# Allegro board HAT_MANUALROUTE_2_GND_MITERED.brd
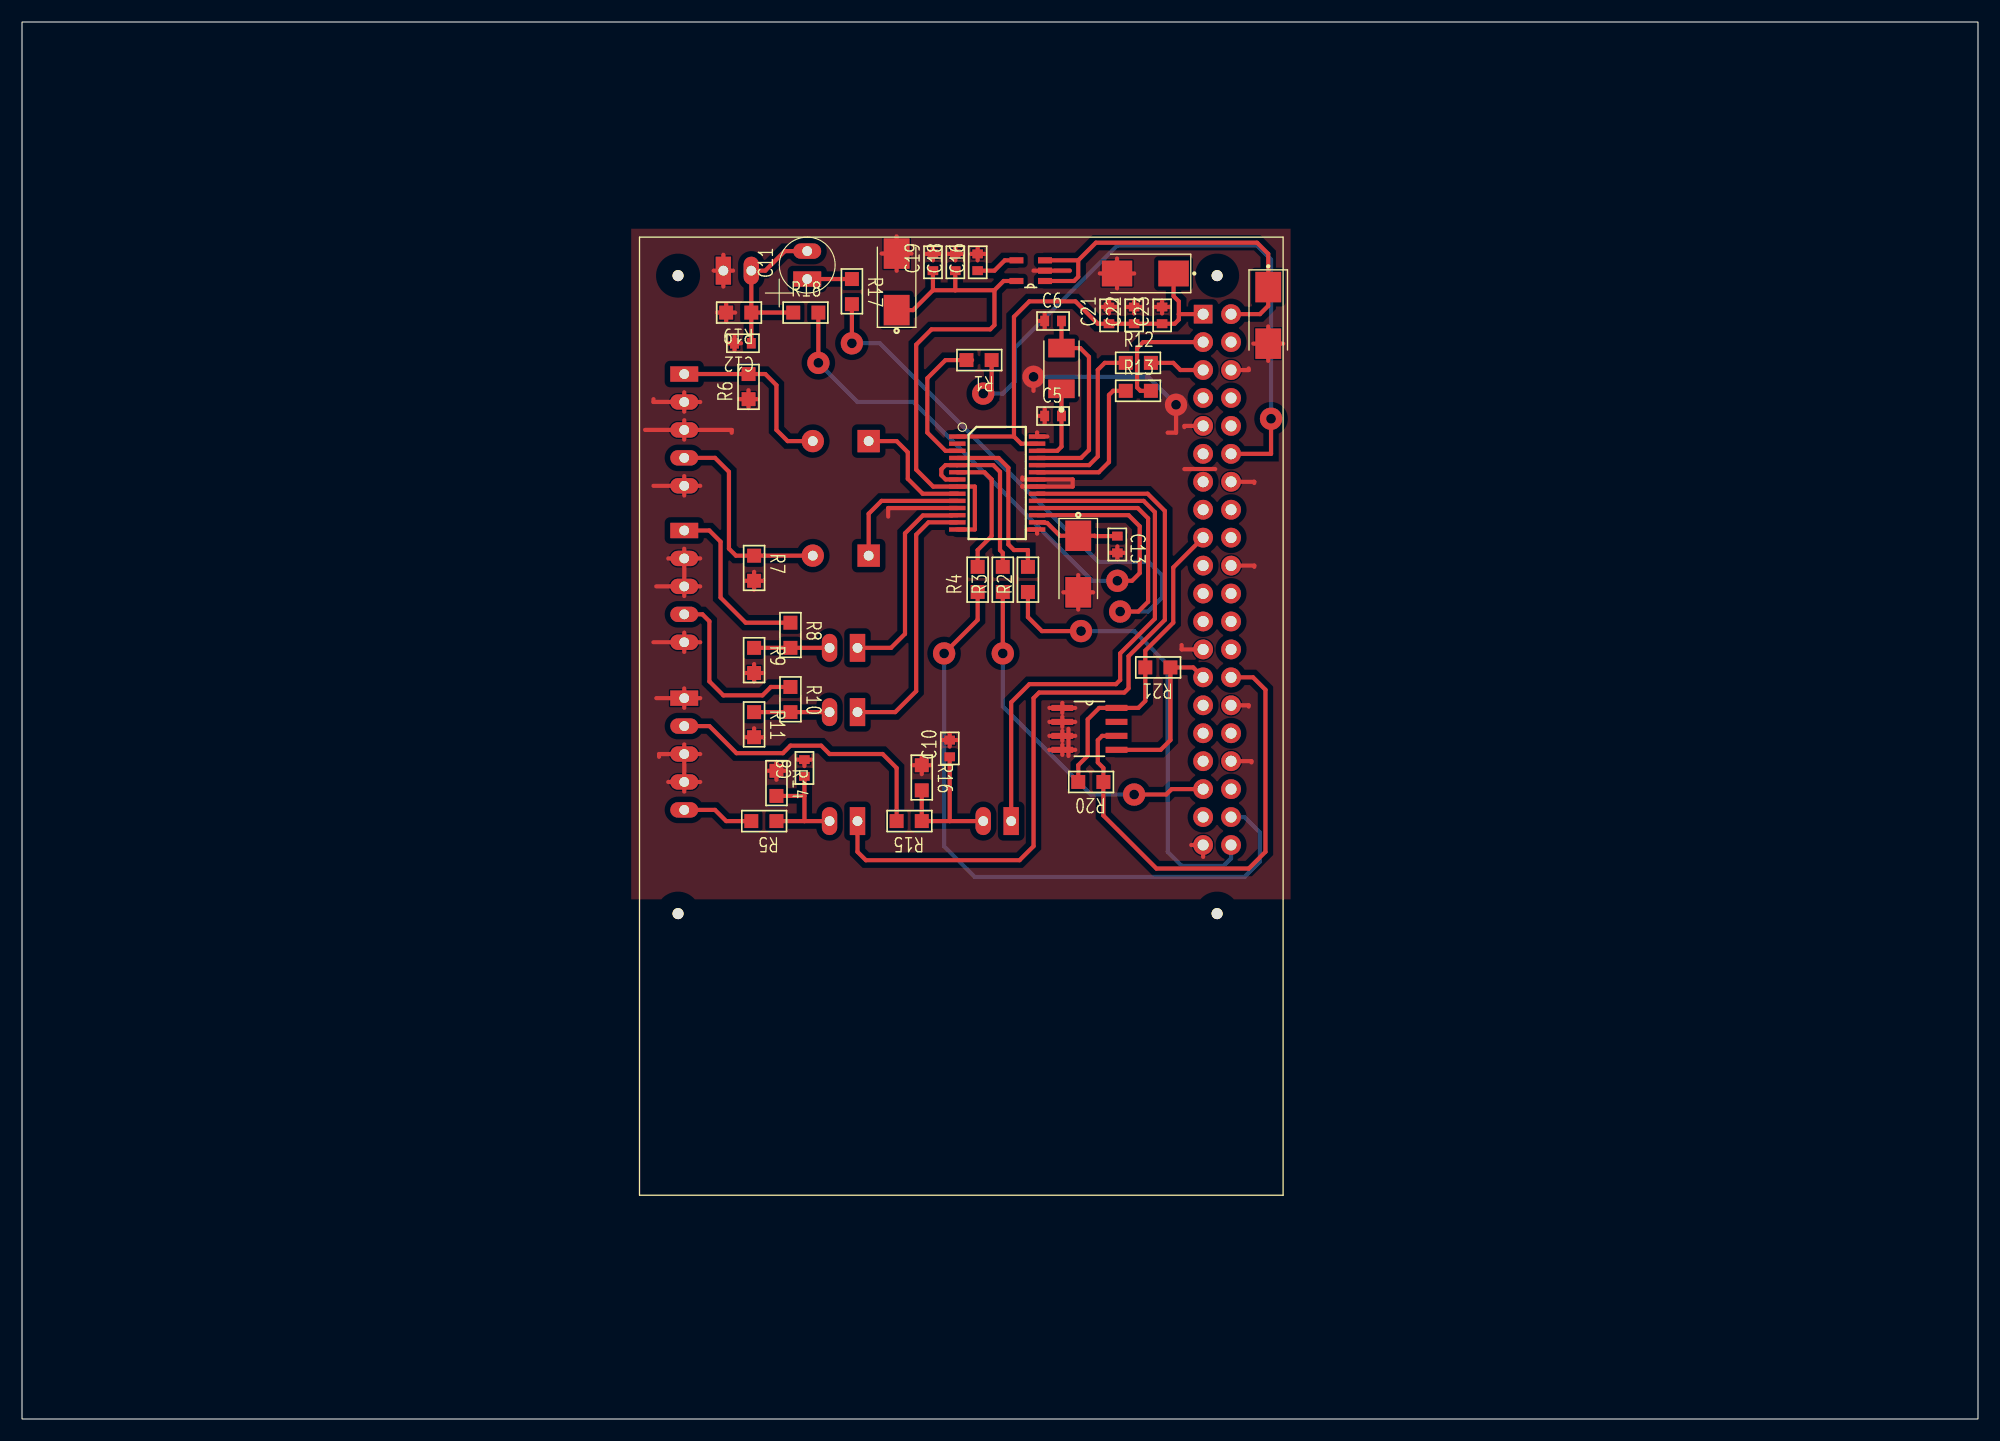
[diagram p0: board, top side]
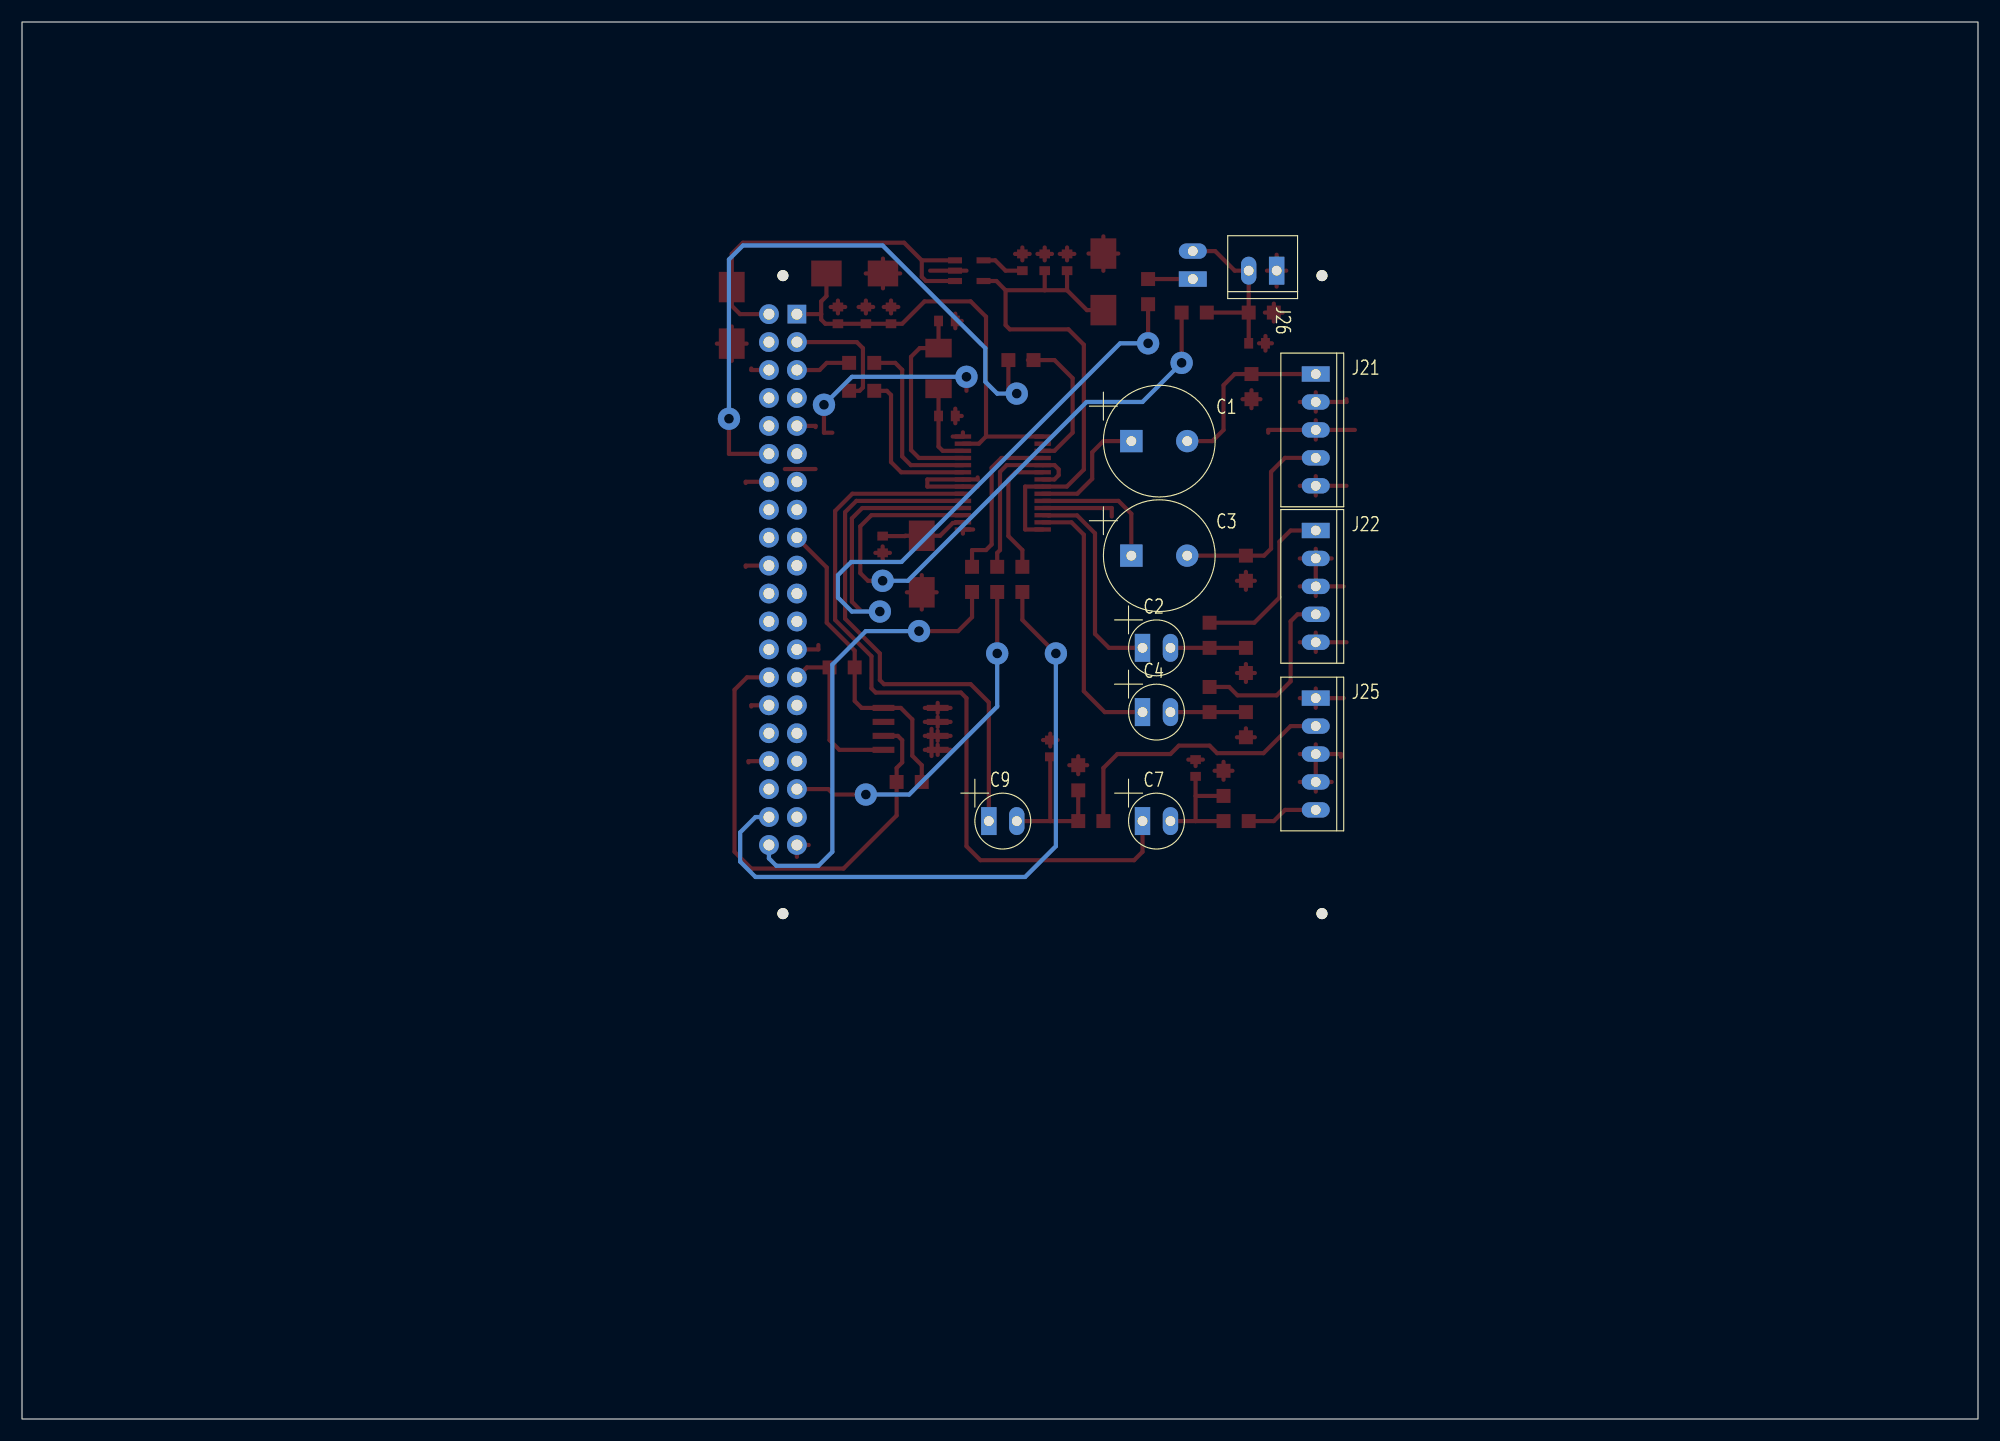
[diagram p1: board, bottom side, seen from below]

Outline 177.8 x 127 mm; copper layers: TOP, BOTTOM. Coordinates in mm from the lower left corner of the outline.
Outline path: rectangle 0,0 177.8,127

## Design rules (mm)
constraint set DEFAULT: min track width 0.381

## Placement (name value [footprint] x y rotation side)
C1  220uF  [GU-CAPCYL200]  76.96 88.9 180 bottom
C2  10uF  [GU-CAPCYL100]  75.95 70.1 180 bottom
C3  220uF  [GU-CAPCYL200]  76.96 78.49 180 bottom
C4  10uF  [GU-CAPCYL100]  75.95 64.26 180 bottom
C5  22pF  [GU-C0603]  92.96 91.19 0 top
C6  22pF  [GU-C0603]  92.96 99.82 0 top
C7  1uF  [GU-CAPCYL100]  75.95 54.36 180 bottom
C8  220pF  [GU-C0603]  71.12 58.42 90 top
C9  1uF  [GU-CAPCYL100]  89.92 54.36 180 bottom
C10  220pF  [GU-C0603]  84.33 60.2 90 top
C11  1uF  [GU-CAPCYL100]  71.37 103.63 90 top
C12  220pF  [GU-C0603]  66.29 97.79 180 top
C13  0.1uF  [GU-C0603]  99.57 80.26 270 top
C14  10uF  [GU-C2312]  96.01 77.72 270 top
C15  10uF  [GU-C2312]  113.28 100.33 270 top
C16  0.01uF  [GU-C0603]  86.87 104.39 90 top
C17  10uF  [GU-C2312]  79.5 103.38 90 top
C18  0.1uF  [GU-C0603]  84.84 104.39 90 top
C19  0.1uF  [GU-C0603]  82.8 104.39 90 top
C20  10uF  [GU-C2312]  102.11 104.14 180 top
C21  0.1uF  [GU-C0603]  98.81 99.57 90 top
C22  0.1uF  [GU-C0603]  101.09 99.57 90 top
C23  0.1uF  [GU-C0603]  103.63 99.57 90 top
J21  HEADPHONES  [GU-MOLEX5]  60.2 95 180 bottom
J22  LINEOUT  [GU-MOLEX5]  60.2 80.77 180 bottom
J25  LINEIN  [GU-MOLEX5]  60.2 65.53 180 bottom
J26  MIC  [GU-MOLEX2]  63.75 104.39 270 bottom
J30  Pi Header  [GU-RASP-PI-3]  56.13 107.44 270 top
R1  33  [GU-R0805]  88.14 96.27 180 top
R2  33  [GU-R0805]  91.44 75.18 90 top
R3  33  [GU-R0805]  89.15 75.18 90 top
R4  33  [GU-R0805]  86.87 75.18 90 top
R5  5.6k  [GU-R0805]  68.58 54.36 180 top
R6  47k  [GU-R0805]  66.04 92.71 90 top
R7  47k  [GU-R0805]  66.55 78.49 270 top
R8  100  [GU-R0805]  69.85 72.39 270 top
R9  47k  [GU-R0805]  66.55 70.1 270 top
R10  100  [GU-R0805]  69.85 66.55 270 top
R11  47k  [GU-R0805]  66.55 64.26 270 top
R12  33  [GU-R0805]  100.33 96.01 0 top
R13  33  [GU-R0805]  100.33 93.47 0 top
R14  5.6k  [GU-R0805]  68.58 58.93 270 top
R15  5.6k  [GU-R0805]  81.79 54.36 180 top
R16  5.6k  [GU-R0805]  81.79 59.44 270 top
R17  330  [GU-R0805]  75.44 103.63 270 top
R18  680  [GU-R0805]  70.1 100.58 0 top
R19  47k  [GU-R0805]  66.29 100.58 180 top
R20  330  [GU-R0805]  98.3 57.91 180 top
R21  330  [GU-R0805]  104.39 68.33 180 top
U1  CODECODER-WM8731SEDSV  [SSOP28-065-102X52MM]  88.65 85.09 270 top
U2  CAT24C32WI-GT3  [SOIC127P600X175-8N]  97.03 62.74 0 top
U3  TPS79333DBVR  [SOT95P280X145-5N]  91.69 104.39 180 top
Y1  CRYSTAL12.288MHz  [XTAL500X320X120]  94.49 95.5 90 top

## Library data of the parts
C1-C4 C7 C9 C11 = CAP POL
C5 C6 C8 C10 C12-C23 = CAP NP
J21 J22 J25 = HEADER 5
J26 = HEADER 2
J30 = HEADER 20X2
R1-R21 = RESISTOR
U1 = CODECODER-WM8731SEDSV_0
U2 = CAT24C32WI-GT3_2
U3 = TPS79333DBVR_3
Y1 = CRYSTAL

## Footprints (pads in the part's own frame, mm; a bottom-side part is the same pattern mirrored in y, then rotated)
GU-C0603
  rect 0.813x0.965 smd: 1(0,0) 2(1.524,0)
GU-C2312
  rect 2.77x2.35 smd: 1(-2.57,0) 2(2.57,0)
GU-CAPCYL100
  rect 1.397x2.54 hole 0.889: 1(0,0)
  oval 1.397x2.54 hole 0.889: 2(2.54,0)
GU-CAPCYL200
  rect 2.032x2.032 hole 0.889: 1(0,0)
  round 2.032 hole 0.889: 2(5.08,0)
GU-MOLEX2
  rect 2.54x1.397 hole 0.889: 1(0,0)
  oval 2.54x1.397 hole 0.889: 2(0,-2.54)
GU-MOLEX5
  rect 2.54x1.397 hole 0.889: 1(0,0)
  oval 2.54x1.397 hole 0.889: 2(0,-2.54) 3(0,-5.08) 4(0,-7.62) 5(0,-10.16)
GU-R0805
  rect 1.27x1.27 smd: 1(0,0) 2(2.286,0)
GU-RASP-PI-3
  round 1 hole 3 unplated: (3.5,52.5) (3.5,3.5) (61.5,52.5) (61.5,3.5)
  rect 1.7x1.7 hole 1: 1(7,51.23)
  round 1.8 hole 1: 2(7,53.77) 3(9.54,51.23) 4(9.54,53.77) 5(12.08,51.23) 6(12.08,53.77) 7(14.62,51.23) 8(14.62,53.77) 9(17.16,51.23) 10(17.16,53.77) 11(19.7,51.23) 12(19.7,53.77) 13(22.24,51.23) 14(22.24,53.77) 15(24.78,51.23) 16(24.78,53.77) 17(27.32,51.23) 18(27.32,53.77) 19(29.86,51.23) 20(29.86,53.77) 21(32.4,51.23) 22(32.4,53.77) 23(34.94,51.23) 24(34.94,53.77) 25(37.48,51.23) 26(37.48,53.77) 27(40.02,51.23) 28(40.02,53.77) 29(42.56,51.23) 30(42.56,53.77) 31(45.1,51.23) 32(45.1,53.77) 33(47.64,51.23) 34(47.64,53.77) 35(50.18,51.23) 36(50.18,53.77) 37(52.72,51.23) 38(52.72,53.77) 39(55.26,51.23) 40(55.26,53.77)
SOIC127P600X175-8N
  rect 1.981x0.559 smd: 1(-2.464,1.905) 2(-2.464,0.635) 3(-2.464,-0.635) 4(-2.464,-1.905) 5(2.464,-1.905) 6(2.464,-0.635) 7(2.464,0.635) 8(2.464,1.905)
SOT95P280X145-5N
  rect 1.27x0.559 smd: 1(-1.295,0.94) 2(-1.295,0) 3(-1.295,-0.94) 4(1.295,-0.94) 5(1.295,0.94)
SSOP28-065-102X52MM
  rect 0.4x1.5 smd: 1(-4.225,-3.625) 2(-3.575,-3.625) 3(-2.925,-3.625) 4(-2.275,-3.625) 5(-1.625,-3.625) 6(-0.975,-3.625) 7(-0.325,-3.625) 8(0.325,-3.625) 9(0.975,-3.625) 10(1.625,-3.625) 11(2.275,-3.625) 12(2.925,-3.625) 13(3.575,-3.625) 14(4.225,-3.625) 15(4.225,3.625) 16(3.575,3.625) 17(2.925,3.625) 18(2.275,3.625) 19(1.625,3.625) 20(0.975,3.625) 21(0.325,3.625) 22(-0.325,3.625) 23(-0.975,3.625) 24(-1.625,3.625) 25(-2.275,3.625) 26(-2.925,3.625) 27(-3.575,3.625) 28(-4.225,3.625)
XTAL500X320X120
  rect 1.7x2.4 smd: 1(-1.85,0) 2(1.85,0)

## Nets
3V3: C20.1 C21.1 C22.1 C23.1 J30.1 J30.17 R20.2 R21.2 U1.1 U1.27 U2.8
5V: C15.1 J30.2 U3.1 U3.3
AVDD: C17.1 C18.1 C19.1 U1.8 U1.14 U3.5(OUT)
GND: C5.1 C6.1 C8.2 C10.2 C12.2 C13.2 C14.2 C15.2 C16.2 C17.2 C18.2 C19.2 C20.2 C21.2 C22.2 C23.2 J21.2 J21.3 J21.5 J22.2 J22.3 J22.5 J25.1 J25.3 J25.4 J26.1 J30.6 J30.9 J30.14 J30.20 J30.25 J30.30 J30.34 J30.39 R6.1 R7.2 R9.2 R11.2 R14.1 R16.1 R19.2 U1.11 U1.15 U1.21 U1.22 U1.28 U2.1 U2.2 U2.3 U2.4 U3.2
ID_SC: J30.28 R20.1 U2.6
ID_SD: J30.27 R21.1 U2.5
LLINEIN: C7.1 U1.20
MICBIAS: R18.2 U1.17
MICIN: R17.2 U1.18
PCM_CLK: J30.12 R1.1
PCM_DIN: J30.38 R4.1
PCM_DOUT: J30.40 R2.1
PCM_FS: J30.35 R3.1
RLINEIN: C9.1 U1.19
SCL: J30.5 R12.2
SDA: J30.3 R13.2
N01053: C3.1 U1.10
N01151: C2.2 R8.2 R9.1
N01760: C4.2 R10.2 R11.1
N01805: J22.4 R10.1
N01861: C4.1 U1.13
N02043: C5.2 U1.26(XTO) Y1.1
N02568: C6.2 U1.25 Y1.2
N02593: R3.2 U1.5 U1.7
N02655: R4.2 U1.6
N02659: R1.2 U1.3
N02663: R2.2 U1.4
N02774: C7.2 C8.1 R5.1 R14.2
N03703: C9.2 C10.1 R15.1 R16.2
N03821: J25.2 R15.2
N04964: C11.2 C12.1 J26.2 R18.1 R19.1
N05381: C11.1 R17.1
N05825: C13.1 C14.1 U1.16
N11580: J25.5 R5.2
N17132: C16.1 U3.4
N57863: R12.1 U1.24
N57889: R13.1 U1.23
N91990: C1.2 J21.1 R6.2
N91992: C1.1 U1.9
N92460: C3.2 J21.4 R7.1
N95445: C2.1 U1.12
N95456: J22.1 R8.1

Pads without a net: J30 4 7 8 10 11 13 15 16 18 19 21 22 23 24 26 29 31 32 33 36 37; U1 2; U2 7

## Via types
v1: diameter 2.032, hole 0.889, TOP to BOTTOM, 12 vias

## Routing (per net, layer and track width the routed paths; a pad name or vN(x,y) marks a point on that pad's centre or on a via; arc(x,y) is an arc through that point)
3V3: length 70.6
  TOP w0.381: 105.16,100.44 105.16,101.6 104.68,102.08 C20.1 ; 105.16,100.44 J30.1 ; 105.16,100.44 105.16,99.95 104.78,99.57 C23.1 C22.1 C21.1 97.79,99.57 95.76,101.6 91.57,101.6 90.17,100.2 90.17,89.32 ; 90.17,89.32 90.82,88.67 U1.27 ; 90.17,89.32 U1.1 ; J30.17 104.65,77.41 104.65,72.39 102.11,69.85 R21.2 102.11,65.28 101.47,64.64 U2.8 97.92,64.64 96.87,63.6 96.87,60.3 96.01,59.44 R20.2
5V: length 34.5
  TOP w0.381: 96.01,105.33 96.01,103.84 95.63,103.45 U3.1 ; 96.01,105.33 U3.3 ; 96.01,105.33 97.61,106.93 112.27,106.93 113.28,105.92 C15.1 113.28,101.2 112.53,100.44 J30.2
AVDD: length 49.4
  TOP w0.381: 82.8,102.62 81,100.81 C17.1 ; 82.8,102.62 C19.1 ; 82.8,102.62 84.84,102.62 ; U1.14 86.61,80.86 86.61,84.76 U1.8 82.82,84.76 81.28,86.31 81.28,97.66 82.68,99.06 88.01,99.06 88.39,99.44 88.39,102.62 ; 88.39,102.62 89.23,103.45 U3.5 ; 88.39,102.62 84.84,102.62 ; 84.84,102.62 C18.1
GND: length 210.4
  TOP w0.381: C6.1 92.96,100.48 ; C6.1 92.96,99.16 ; C6.1 92.38,99.82 ; 112.01,77.47 112.01,77.58 J30.20 ; 99.54,102.79 C20.2 ; C20.2 101.1,104.14 ; C20.2 97.97,104.14 ; C20.2 99.54,105.49 ; C5.1 92.96,91.85 ; C5.1 92.38,91.19 ; C5.1 92.96,90.53 ; C19.2 83.46,105.92 ; C19.2 82.14,105.92 ; C19.2 82.8,106.5 ; C19.2 82.8,105.33 ; 84.33,61.14 C10.2 ; C10.2 84.99,61.72 ; C10.2 84.33,62.31 ; C10.2 83.67,61.72 ; 107.36,51.1 J30.39 106.29,52.18 ; J25.3 60.2,61.33 ; J25.3 J25.4 ; J25.3 57.91,60.45 57.91,60.2 ; J25.3 61.65,60.45 ; 105.66,90.17 105.66,90.28 J30.9 ; J21.3 60.2,90.79 ; J21.3 64.52,89.92 64.52,89.66 ; J21.3 60.2,89.04 ; J21.3 56.64,89.92 ; 65.73,61.98 R11.2 ; R11.2 67.36,61.98 ; R11.2 66.55,62.79 ; 66.04,91.9 R6.1 ; R6.1 66.85,92.71 ; R6.1 66.04,93.52 ; R6.1 65.23,92.71 ; R14.1 68.58,59.74 ; R14.1 69.39,58.93 ; R14.1 68.58,58.11 ; R14.1 67.77,58.93 ; U2.3 94.56,62.56 ; U2.3 94.56,61.65 ; U2.3 95.73,62.1 ; U2.3 93.4,62.1 ; 94.56,62.92 U2.2 ; U2.2 94.56,63.83 ; U2.2 95.73,63.37 ; U2.2 93.4,63.37 ; 58.75,57.91 J25.4 ; J25.4 61.65,57.91 ; J25.4 60.2,57.04 ; C16.2 87.53,105.92 ; C16.2 86.87,106.5 ; C16.2 86.21,105.92 ; C16.2 86.87,105.33 ; 92.27,89.69 U1.28 93.2,89.32 ; J21.2 60.2,93.33 ; J21.2 60.2,91.58 ; J21.2 61.65,92.46 ; J21.2 57.4,92.46 57.4,92.71 ; 66.55,75.39 R7.2 ; R7.2 65.73,76.2 ; R7.2 66.55,77.01 ; R7.2 67.36,76.2 ; R9.2 66.55,68.63 ; R9.2 66.55,67 ; R9.2 67.36,67.82 ; R9.2 65.73,67.82 ; 104.14,89.66 104.9,89.66 v1(104.9,92.2) ; 80.97,59.44 R16.1 ; R16.1 81.79,58.62 ; R16.1 82.6,59.44 ; R16.1 81.79,60.25 ; 90.93,84.84 90.93,84.76 U1.21 95.5,84.76 95.5,85.42 U1.22 90.93,85.42 90.93,85.6 ; J30.6 111.51,95.36 111.51,95.5 ; U2.4 94.56,61.29 ; U2.4 93.4,60.83 ; U2.4 94.56,60.38 ; U2.4 95.73,60.83 ; 98.81,100.51 C21.2 ; C21.2 99.47,101.09 ; C21.2 98.81,101.68 ; C21.2 98.15,101.09 ; C23.2 104.29,101.09 ; C23.2 102.97,101.09 ; C23.2 103.63,100.51 ; C23.2 103.63,101.68 ; J26.1 64.63,104.39 ; J26.1 63.75,105.84 ; J26.1 63.75,102.95 ; J26.1 62.88,104.39 ; 91.34,80.86 U1.15 92.27,80.49 ; J22.5 60.2,71.49 ; J22.5 57.4,70.61 ; J22.5 61.65,70.61 ; J22.5 60.2,69.74 ; C13.2 100.23,78.74 ; C13.2 99.57,79.32 ; C13.2 98.91,78.74 ; C13.2 99.57,78.16 ; 79.5,104.38 C17.2 ; C17.2 79.5,107.51 ; C17.2 78.15,105.95 ; C17.2 80.86,105.95 ; 58.75,78.23 J22.2 ; J22.2 60.2,79.11 ; J22.2 61.65,78.23 ; J22.2 J22.3 ; J30.30 111.51,64.88 111.51,64.77 ; C15.2 113.28,99.32 ; C15.2 113.28,96.2 ; C15.2 111.93,97.76 ; C15.2 114.64,97.76 ; J21.5 57.4,84.84 ; J21.5 61.65,84.84 ; J21.5 60.2,83.96 ; J21.5 60.2,85.71 ; J22.3 61.65,75.69 ; J22.3 57.66,75.69 ; J22.3 60.2,74.82 ; R19.2 64.82,100.58 ; R19.2 63.19,100.58 ; R19.2 64.01,101.4 ; R19.2 64.01,99.77 ; 70.46,59.94 C8.2 ; C8.2 71.78,59.94 ; C8.2 71.12,59.36 ; 64.19,97.79 C12.2 ; C12.2 64.77,98.45 ; C12.2 64.77,97.13 ; C12.2 65.35,97.79 ; U2.1 95.73,64.64 ; U2.1 93.4,64.64 ; U2.1 94.56,65.1 ; U2.1 94.56,64.19 ; 111.76,59.69 111.76,59.8 J30.34 ; U1.11 78.74,82.81 78.74,82.04 ; C22.2 101.75,101.09 ; C22.2 100.43,101.09 ; C22.2 101.09,100.51 ; C22.2 101.09,101.68 ; 91.95,93.47 v1(91.95,94.74) ; 105.41,70.36 105.41,69.96 J30.25 ; 95.25,104.39 U3.2 91.95,104.39 ; 95.12,60.27 95.12,62.74 ; J30.14 112.01,85.2 112.01,85.09 ; 60.2,64.66 J25.1 ; J25.1 61.65,65.53 ; J25.1 60.2,66.41 ; J25.1 57.66,65.53 ; C18.2 84.84,106.5 ; C18.2 84.18,105.92 ; C18.2 85.5,105.92 ; C18.2 84.84,105.33 ; 108.46,86.36 105.66,86.36 ; C14.2 96.01,76.72 ; C14.2 94.66,75.15 ; C14.2 97.37,75.15 ; C14.2 96.01,73.59
  BOTTOM w0.381: v1(104.9,92.2) 102.36,94.74 v1(91.95,94.74)
ID_SC: length 44.6
  TOP w0.381: J30.28 111.9,67.42 113.03,66.29 113.03,51.56 111.51,50.04 103.12,50.04 98.3,54.86 R20.1 98.3,59.18 97.79,59.69 97.79,61.71 98.18,62.1 U2.6
ID_SD: length 15.2
  TOP w0.381: J30.27 106.46,68.33 R21.1 104.39,61.72 103.51,60.83 U2.5
LLINEIN: length 71.9
  TOP w0.381: U1.20 102.32,84.11 103.89,82.55 103.89,72.64 100.58,69.34 100.58,66.42 100.2,66.04 92.46,66.04 91.95,65.53 91.95,52.07 90.68,50.8 76.71,50.8 75.95,51.56 C7.1
MICBIAS: length 56.3
  TOP w0.381: v1(72.39,96.01) R18.2 ; U1.17 100.59,82.16 101.6,81.15 101.6,76.9 100.9,76.2 v1(99.57,76.2)
  BOTTOM w0.381: v1(72.39,96.01) 75.95,92.46 81.03,92.46 97.28,76.2 v1(99.57,76.2)
MICIN: length 67.8
  TOP w0.381: v1(75.44,97.79) R17.2 ; U1.18 101.42,82.81 102.36,81.88 102.36,74.3 101.47,73.41 v1(99.82,73.41)
  BOTTOM w0.381: v1(99.82,73.41) 102.36,73.41 103.63,74.68 103.63,76.71 102.43,77.91 97.85,77.91 77.98,97.79 v1(75.44,97.79)
PCM_CLK: length 59.2
  TOP w0.381: v1(113.54,90.93) 113.54,87.74 J30.12 ; R1.1 88.14,93.22 v1(87.38,93.22)
  BOTTOM w0.381: v1(113.54,90.93) 113.54,105.41 112.27,106.68 99.57,106.68 90.23,97.35 90.23,94.3 89.15,93.22 v1(87.38,93.22)
PCM_DIN: length 60.7
  TOP w0.381: R4.1 86.87,72.64 v1(83.82,69.6)
  BOTTOM w0.381: v1(83.82,69.6) 83.82,52.07 86.61,49.28 111.12,49.28 112.52,50.67 112.52,53.33 111.12,54.72 J30.38
PCM_DOUT: length 41.6
  TOP w0.381: v1(96.27,71.63) 92.71,71.63 91.44,72.9 R2.1
  BOTTOM w0.381: J30.40 109.9,50.96 109.23,50.29 105.41,50.29 104.14,51.56 104.14,68.58 101.09,71.63 v1(96.27,71.63)
PCM_FS: length 32.1
  TOP w0.381: R3.1 v1(89.15,69.6) ; J30.35 104.51,57.26 104.01,56.77 v1(101.09,56.77)
  BOTTOM w0.381: v1(101.09,56.77) 97.16,56.77 89.15,64.77 v1(89.15,69.6)
RLINEIN: length 49.2
  TOP w0.381: U1.19 101.96,83.46 102.98,82.44 102.98,72.76 99.82,69.6 99.82,67.18 99.44,66.8 91.57,66.8 89.92,65.15 C9.1
SCL: length 5
  TOP w0.381: R12.2 104.65,96.01 105.3,95.36 J30.5
SDA: length 11.2
  TOP w0.381: R13.2 101.66,93.47 101.36,93.78 101.36,97.34 101.92,97.9 J30.3
N01053: length 12.4
  TOP w0.381: U1.10 78.13,83.46 76.96,82.3 C3.1
N01151: length 6.9
  TOP w0.381: R9.1 R8.2 C2.2
N01760: length 6.9
  TOP w0.381: R11.1 R10.2 C4.2
N01805: length 16.2
  TOP w0.381: R10.1 68.07,66.55 67.31,65.79 63.75,65.79 62.48,67.06 62.48,72.52 61.85,73.15 J22.4
N01861: length 24.6
  TOP w0.381: U1.13 82.4,81.51 81.28,80.39 81.28,66.17 79.38,64.26 C4.1
N02043: length 7.6
  TOP w0.381: U1.26 94.11,88.02 94.49,88.4 C5.2 Y1.1
N02568: length 18.8
  TOP w0.381: U1.25 96.27,87.37 96.99,88.09 96.99,96.56 96.19,97.35 Y1.2 C6.2
N02593: length 16.6
  TOP w0.381: R3.2 89.15,78.74 88.9,78.99 88.9,86.11 88.29,86.72 U1.5 83.95,86.72 83.57,86.33 83.57,85.8 83.95,85.42 U1.7
N02655: length 11.9
  TOP w0.381: U1.6 87.49,86.07 88.14,85.42 88.14,80.26 86.87,78.99 R4.2
N02659: length 13.1
  TOP w0.381: 86.36,96.27 R1.2 83.95,96.27 82.3,94.61 82.3,89.67 83.95,88.02 U1.3
N02663: length 15.5
  TOP w0.381: R2.2 91.44,78.99 90.17,78.99 89.66,79.5 89.66,86.48 88.77,87.37 U1.4
N02774: length 11.4
  TOP w0.381: 71.12,56.64 R14.2 ; 71.12,56.64 71.12,54.36 ; 71.12,56.64 C8.1 ; 71.12,54.36 R5.1 ; 71.12,54.36 C7.2
N03703: length 14.2
  TOP w0.381: C10.1 84.33,54.36 ; 84.33,54.36 R15.1 R16.2 ; 84.33,54.36 C9.2
N03821: length 26.3
  TOP w0.381: J25.2 62.48,62.99 64.95,60.53 69.16,60.53 69.85,61.21 72.64,61.21 73.41,60.45 78.23,60.45 79.5,59.18 R15.2
N04964: length 16.2
  TOP w0.381: R18.1 R19.1 ; R19.1 J26.2 67.56,104.39 69.34,106.17 C11.2 ; R19.1 C12.1
N05381: length 4.1
  TOP w0.381: C11.1 R17.1
N05825: length 8.1
  TOP w0.381: 99.82,80.26 C13.1 97.53,80.26 97.5,80.29 C14.1 94.35,80.29 93.18,81.46 93.01,81.46 92.95,81.51 U1.16
N11580: length 6.5
  TOP w0.381: R5.2 64.01,54.36 62.99,55.37 J25.5
N17132: length 3.9
  TOP w0.381: U3.4 89.33,105.33 88.39,104.39 C16.1
N57863: length 16.5
  TOP w0.381: U1.24 97,86.72 97.79,87.5 97.79,95.38 98.43,96.01 R12.1
N57889: length 14.7
  TOP w0.381: U1.23 97.88,86.07 98.81,87 98.81,93.09 99.19,93.47 R13.1
N91990: length 16.6
  TOP w0.381: C1.2 69.6,88.9 68.58,89.92 68.58,93.98 67.56,95 R6.2 J21.1
N91992: length 11.5
  TOP w0.381: U1.9 81.87,84.11 80.52,85.47 80.52,87.88 79.5,88.9 C1.1
N92460: length 19.5
  TOP w0.381: C3.2 R7.1 64.9,78.49 64.26,79.12 64.26,86.11 62.99,87.38 J21.4
N95445: length 19.4
  TOP w0.381: U1.12 84.52,82.16 84.49,82.14 81.89,82.14 80.26,80.52 80.26,71.37 78.99,70.1 C2.1
N95456: length 16.1
  TOP w0.381: R8.1 65.79,72.39 63.5,74.68 63.5,79.76 62.48,80.77 J22.1

## Copper pours and planes (outline as drawn; the poured copper is in the pictures)
GND on TOP: 55.37,108.2 55.37,47.24 115.32,47.24 115.32,108.2 ; 11 cut-outs
